# EAGLE board Maxim 7219 LED display - KingBright 7 segment SC39-11SRWA v.1.1 (EAGLE 7.0.0)
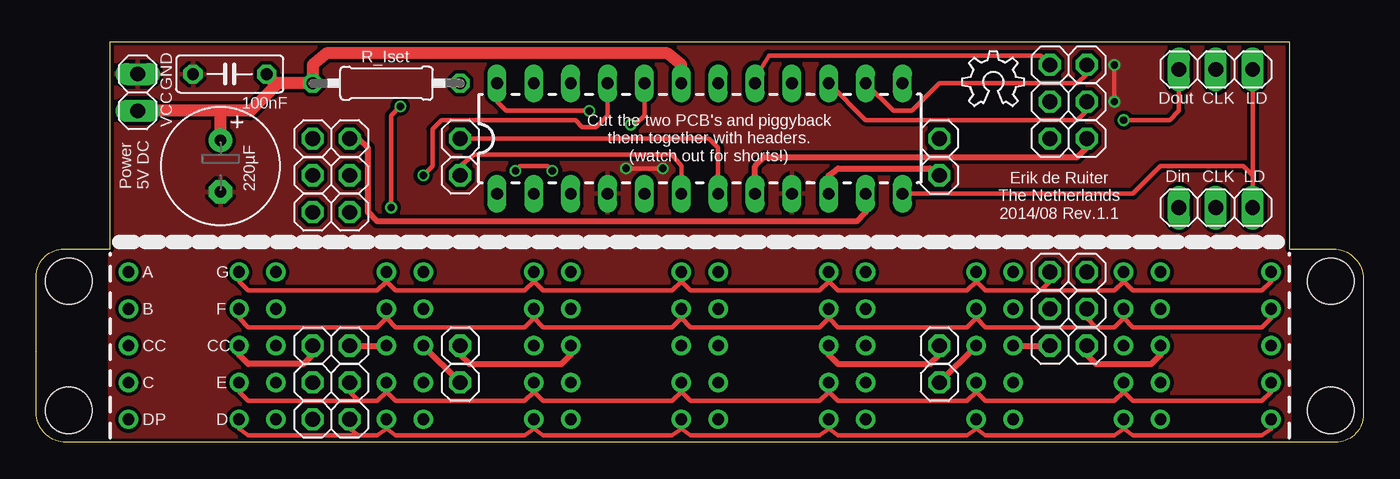
[diagram p0: board, top side]
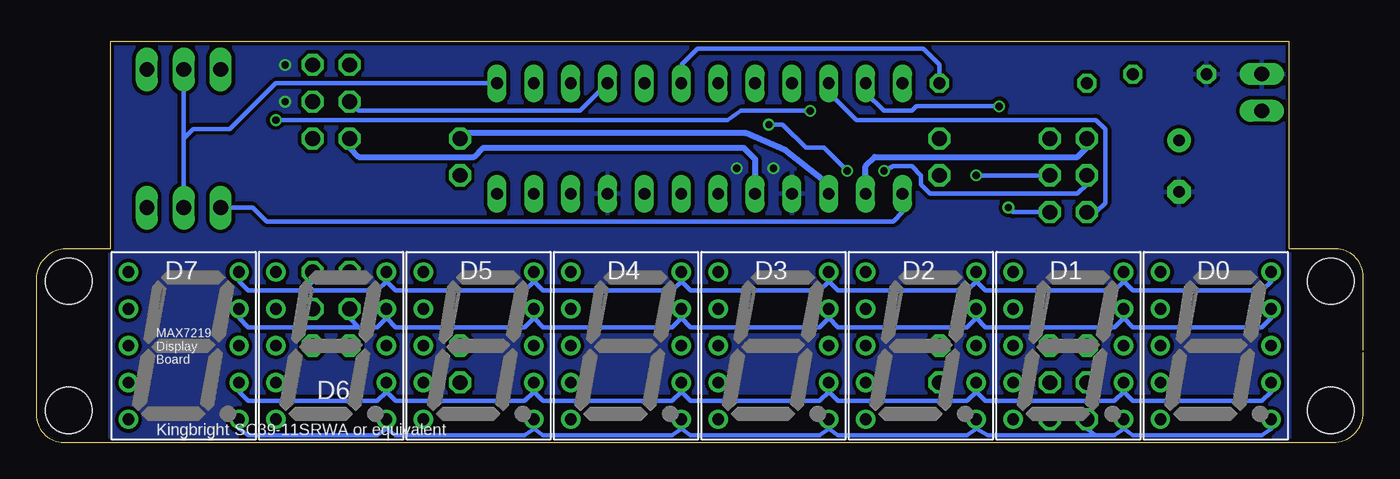
[diagram p1: board, bottom side, seen from below]

Size 91.44 x 27.62 mm. Coordinates in mm from the lower left corner, seen from the top.
Outline: 0,6.35 0,11.43 arc-90 1.91,13.34 5.08,13.34 5.08,27.62 86.36,27.62 86.36,13.34 89.38,13.34 arc-90 91.44,11.27 91.44,1.9 arc-90 89.53,0 2.06,0 arc-90 0,2.06 0,6.19
Copper layers (1*16): Top 0.035mm / dielectric 1.5mm / Bottom 0.035mm
Design rules "ITEADstudio_DRC": minimum track width 6mil, minimum drill 12mil, track to track 6mil, track to pad 6mil, pad to pad 6mil, via to via 6mil, smd to smd 0mil, copper to edge 10mil, drill to drill 10mil, minimum pad ring 10mil, minimum via ring 6mil, stop-mask expansion 2mil, vias tented up to drill 100mil, thermal gap 10mil
Holes 3.2 mm at 2.22,11.11 2.22,2.22 89.22,11.11 89.22,2.22

## Footprints (pad centres in the part's own frame; a part is rotated, then mirrored left to right if it is on the bottom)
E3,5-8 = drill 0.813 pad 1.6: + -1.778,0 | drill 0.813 pad 1.6 octagon: - 1.778,0
C050-025X075 = drill 0.813 octagon: 1 -2.54,0; 2 2.54,0
HDSP-E = drill 0.813: 1 -3.81,5.08; 2 -3.81,2.54; 3 -3.81,0; 4 -3.81,-2.54; 5 -3.81,-5.08; 6 3.81,-5.08; 7 3.81,-2.54; 8 3.81,0; 9 3.81,2.54; 10 3.81,5.08
1X01 = drill 1.016 octagon: 1 0,0
1X03 = drill 1.016 long: 1 -2.54,0; 2 0,0; 3 2.54,0
1X02 = drill 1.016 long: 1 -1.27,0; 2 1.27,0
0207/10 = drill 0.813 octagon: 1 -5.08,0; 2 5.08,0
DIL24 = drill 0.813 long: 1 -13.97,-3.81; 2 -11.43,-3.81; 3 -8.89,-3.81; 4 -6.35,-3.81; 5 -3.81,-3.81; 6 -1.27,-3.81; 7 1.27,-3.81; 8 3.81,-3.81; 9 6.35,-3.81; 10 8.89,-3.81; 11 11.43,-3.81; 12 13.97,-3.81; 13 13.97,3.81; 14 11.43,3.81; 15 8.89,3.81; 16 6.35,3.81; 17 3.81,3.81; 18 1.27,3.81; 19 -1.27,3.81; 20 -3.81,3.81; 21 -6.35,3.81; 22 -8.89,3.81; 23 -11.43,3.81; 24 -13.97,3.81

## Placement (x,y rotation side)
C3  220µF  [E3,5-8]  12.69,19.05 270 top
C4  100nF  [C050-025X075]  13.34,25.4 180 top
D0  SC39-11SRWA  [HDSP-E]  10.16,6.67 0 bottom
D1  SC39-11SRWA  [HDSP-E]  20.32,6.67 0 bottom
D2  SC39-11SRWA  [HDSP-E]  30.48,6.67 0 bottom
D3  SC39-11SRWA  [HDSP-E]  40.64,6.67 0 bottom
D4  SC39-11SRWA  [HDSP-E]  50.8,6.67 0 bottom
D5  SC39-11SRWA  [HDSP-E]  60.96,6.67 0 bottom
D6  SC39-11SRWA  [HDSP-E]  71.12,6.67 0 bottom
D7  SC39-11SRWA  [HDSP-E]  81.28,6.67 0 bottom
DIG_0_D  [1X01]  19.05,6.67 0 top
DIG_0_M  [1X01]  19.05,20.95 0 top
DIG_1_D  [1X01]  21.59,6.67 0 top
DIG_1_M  [1X01]  21.59,20.95 0 top
DIG_2_D  [1X01]  29.21,4.13 0 top
DIG_2_M  [1X01]  29.21,18.41 0 top
DIG_3_D  [1X01]  29.21,6.67 0 top
DIG_3_M  [1X01]  29.21,20.95 0 top
DIG_4_D  [1X01]  62.23,6.67 0 top
DIG_4_M  [1X01]  62.23,20.95 0 top
DIG_5_D  [1X01]  62.23,4.13 0 top
DIG_5_M  [1X01]  62.23,18.41 90 top
DIG_6_D  [1X01]  69.85,6.67 0 top
DIG_6_M  [1X01]  69.85,20.95 0 top
DIG_7_D  [1X01]  72.39,6.67 0 top
DIG_7_M  [1X01]  72.39,20.95 0 top
INPUT  [1X03]  81.28,16.19 0 top
OUTPUT  [1X03]  81.28,25.72 0 top
POWER  [1X02]  6.99,24.13 270 top
RSET  [0207/10]  24.13,24.77 0 top
SEG_A_D  [1X01]  72.39,11.75 0 top
SEG_A_M  [1X01]  72.39,26.04 0 top
SEG_B_D  [1X01]  69.85,9.21 0 top
SEG_B_M  [1X01]  69.85,23.49 0 top
SEG_C_D  [1X01]  19.05,4.13 0 top
SEG_C_M  [1X01]  19.05,18.41 0 top
SEG_D_D  [1X01]  21.59,1.59 0 top
SEG_D_M  [1X01]  21.59,15.88 0 top
SEG_DP_D  [1X01]  19.05,1.59 0 top
SEG_DP_M  [1X01]  19.05,15.88 0 top
SEG_E_D  [1X01]  21.59,4.13 0 top
SEG_E_M  [1X01]  21.59,18.41 0 top
SEG_F_D  [1X01]  72.39,9.21 0 top
SEG_F_M  [1X01]  72.39,23.49 0 top
SEG_G_D  [1X01]  69.85,11.75 0 top
SEG_G_M  [1X01]  69.85,26.04 0 top
U$2  [OSHW_6X150_NOTEXT]  63.82,23.18 0 top
U$3  MAX7219DIP  [DIL24]  45.72,20.95 0 top

## Library data of the parts
C3 C4 RSET = rcl
D0 D1-D7 = display-hp; OC_FARNELL: unknown; OC_NEWARK: unknown
DIG_0_D DIG_0_M DIG_1_D DIG_1_M DIG_2_D DIG_2_M DIG_3_D DIG_3_M DIG_4_D DIG_4_M DIG_5_D DIG_5_M DIG_6_D DIG_6_M DIG_7_D DIG_7_M INPUT OUTPUT POWER SEG_A_D SEG_A_M SEG_B_D SEG_B_M SEG_C_D SEG_C_M SEG_D_D SEG_D_M SEG_DP_D SEG_DP_M SEG_E_D SEG_E_M SEG_F_D SEG_F_M SEG_G_D SEG_G_M = pinhead
U$2 = OpenSourceHardwareLogo
U$3 = SparkFun-DigitalIC

## Nets
CLK: INPUT.2 OUTPUT.2 U$3.13
DIG0: DIG_0_M.1 U$3.2
DIG1: DIG_1_M.1 U$3.11
DIG2: DIG_2_M.1 U$3.6
DIG3: DIG_3_M.1 U$3.7
DIG4: DIG_4_M.1 U$3.3
DIG5: DIG_5_M.1 U$3.10
DIG6: DIG_6_M.1 U$3.5
DIG7: DIG_7_M.1 U$3.8
DIG_0: D0.3 DIG_0_D.1
DIG_1: D1.3 DIG_1_D.1
DIG_2: D2.8 DIG_2_D.1
DIG_3: D3.8 DIG_3_D.1
DIG_4: D4.3 DIG_4_D.1
DIG_5: D5.3 DIG_5_D.1
DIG_6: D6.8 DIG_6_D.1
DIG_7: D7.8 DIG_7_D.1
DIN: INPUT.1 U$3.1
DOUT: OUTPUT.1 U$3.24
GND: C3.- C4.2 POWER.1 U$3.4 U$3.9
LOAD: INPUT.3 OUTPUT.3 U$3.12
N$1: D6.3
N$8: D7.3
N$9: RSET.2 U$3.18
SEG_A: D0.10 D1.10 D2.10 D3.10 D4.10 D5.10 D6.10 D7.10 SEG_A_D.1
SEG_B: D0.9 D1.9 D2.9 D3.9 D4.9 D5.9 D6.9 D7.9 SEG_B_D.1
SEG_C: D0.7 D1.7 D2.7 D3.7 D4.7 D5.7 D6.7 D7.7 SEG_C_D.1
SEG_D: D0.5 D1.5 D2.5 D3.5 D4.5 D5.5 D6.5 D7.5 SEG_D_D.1
SEG_DP: D0.6 D1.6 D2.6 D3.6 D4.6 D5.6 D6.6 D7.6 SEG_DP_D.1
SEG_E: D0.4 D1.4 D2.4 D3.4 D4.4 D5.4 D6.4 D7.4 SEG_E_D.1
SEG_F: D0.2 D1.2 D2.2 D3.2 D4.2 D5.2 D6.2 D7.2 SEG_F_D.1
SEG_G: D0.1 D1.1 D2.1 D3.1 D4.1 D5.1 D6.1 D7.1 SEG_G_D.1
SEGA: SEG_A_M.1 U$3.14
SEGB: SEG_B_M.1 U$3.16
SEGC: SEG_C_M.1 U$3.20
SEGD: SEG_D_M.1 U$3.23
SEGDP: SEG_DP_M.1 U$3.22
SEGE: SEG_E_M.1 U$3.21
SEGF: SEG_F_M.1 U$3.15
SEGG: SEG_G_M.1 U$3.17
VCC: C3.+ C4.1 POWER.2 RSET.1 U$3.19

## Tracks (layer width: path | path; a pad name or v marks a point on that pad's centre or on a via)
CLK
  Bottom 0.305: U$3.13 74.93,24.77 78.11,21.59 80.64,21.59 81.28,20.95 | 81.28,20.95 OUTPUT.2 | INPUT.2 81.28,20.95
DIG0
  Bottom 0.406: U$3.2 34.29,19.05 33.66,19.68 19.68,19.68 19.05,20.32 DIG_0_M.1
DIG1
  Top 0.406: DIG_1_M.1 22.23,20.95 22.86,20.32 22.86,15.87 23.5,15.24 56.52,15.24 57.15,15.87 U$3.11
DIG2
  Top 0.305: DIG_2_M.1 29.21,19.05 30.16,19.84 43.81,19.84 44.45,19.05 U$3.6
DIG3
  Top 0.305: DIG_3_M.1 46.35,20.95 46.99,20.32 U$3.7
DIG4
  Bottom 0.406: U$3.3 36.83,17.78 39.85,20.16 42.55,21.32 61.75,21.32 DIG_4_M.1
DIG5
  Top 0.406: U$3.10 54.61,18.42 55.24,18.89 61.59,18.89 DIG_5_M.1
DIG6
  Bottom 0.406: DIG_6_M.1 69.85,20.32 69.22,19.68 61.28,19.68 60.64,20.32 42.7,20.32 41.91,19.53 U$3.5
DIG7
  Top 0.406: U$3.8 49.53,19.05 50.16,19.68 71.75,19.68 72.39,20.32 DIG_7_M.1
DIG_0
  Top 0.406: DIG_0_D.1 19.05,6.03 18.41,5.4 14.61,5.4 13.97,6.03 D0.3
DIG_1
  Top 0.406: DIG_1_D.1 D1.3
DIG_2
  Top 0.406: DIG_2_D.1 D2.8
DIG_3
  Top 0.406: DIG_3_D.1 29.21,6.03 29.84,5.4 36.2,5.4 36.83,6.03 D3.8
DIG_4
  Top 0.406: D4.3 54.61,6.03 55.24,5.4 61.59,5.4 62.23,6.03 DIG_4_D.1
DIG_5
  Top 0.406: DIG_5_D.1 D5.3
DIG_6
  Top 0.406: D6.8 DIG_6_D.1
DIG_7
  Top 0.406: DIG_7_D.1 72.39,6.03 73.03,5.4 76.83,5.4 77.47,6.03 D7.8
DIN
  Bottom 0.305: U$3.1 31.75,15.87 32.38,15.24 75.56,15.24 76.52,16.19 INPUT.1
DOUT  (via drill 0.5 pad 0.25)
  Top 0.305: U$3.24 31.75,23.49 32.38,22.86 v38.1,22.86 | v74.93,22.22 78.11,22.22 78.74,22.86 OUTPUT.1
  Bottom 0.305: v38.1,22.86 42.86,22.86 43.81,22.22 v74.93,22.22
GND  (via drill 0.5 pad 0.25)
  Top 0.305: v40.64,18.89 v43.18,18.89 | v74.3,26.04 v74.3,23.49
  pour Bottom (isolate 0.254): 5.08,27.62 86.36,27.62 86.36,0 5.08,0
  pour Top (isolate 0.254): 5.08,27.62 86.36,27.62 86.36,0 5.08,0
LOAD
  Top 0.305: U$3.12 75.56,17.15 77.47,19.05 83.19,19.05 83.82,18.42 | OUTPUT.3 83.82,18.42 | 83.82,18.42 INPUT.3
N$9
  Bottom 0.305: U$3.18 46.99,26.04 45.88,27.15 30.32,27.15 29.21,26.04 RSET.2
SEG_A
  Bottom 0.305: D0.10 6.35,11.11 6.99,10.48 15.88,10.48 16.51,11.11 | D1.10 16.51,11.11 | 16.51,11.11 17.14,10.48 26.04,10.48 26.67,11.11 | D2.10 26.67,11.11 | 26.67,11.11 27.3,10.48 36.2,10.48 36.83,11.11 | D3.10 36.83,11.11 | 36.83,11.11 37.47,10.48 46.35,10.48 46.99,11.11 | D4.10 46.99,11.11 | 46.99,11.11 47.62,10.48 56.52,10.48 57.15,11.11 | D5.10 57.15,11.11 | 57.15,11.11 57.78,10.48 66.67,10.48 67.31,11.11 | D6.10 67.31,11.11 | 67.31,11.11 67.94,10.48 73.03,10.48 | 73.03,10.48 76.83,10.48 77.47,11.11 D7.10 | SEG_A_D.1 72.39,11.11 73.03,10.48
SEG_B
  Bottom 0.305: D0.9 6.35,8.57 6.99,7.94 15.88,7.94 16.51,8.57 | D1.9 16.51,8.57 | 16.51,8.57 17.14,7.94 26.04,7.94 26.67,8.57 | D2.9 26.67,8.57 | 26.67,8.57 27.3,7.94 36.2,7.94 36.83,8.57 | D3.9 36.83,8.57 | 36.83,8.57 37.47,7.94 46.35,7.94 46.99,8.57 | D4.9 46.99,8.57 | 46.99,8.57 47.62,7.94 56.52,7.94 57.15,8.57 | D5.9 57.15,8.57 | 57.15,8.57 57.78,7.94 66.67,7.94 67.31,8.57 | D6.9 67.31,8.57 | 67.31,8.57 67.94,7.94 69.22,7.94 | 69.22,7.94 76.83,7.94 77.47,8.57 D7.9 | SEG_B_D.1 69.85,8.57 69.22,7.94
SEG_C
  Bottom 0.305: D0.7 6.35,3.49 6.99,2.86 15.88,2.86 16.51,3.49 | D1.7 16.51,3.49 | 16.51,3.49 17.14,2.86 18.41,2.86 | 18.41,2.86 26.04,2.86 26.67,3.49 | D2.7 26.67,3.49 | 26.67,3.49 27.3,2.86 36.2,2.86 36.83,3.49 | D3.7 36.83,3.49 | 36.83,3.49 37.47,2.86 46.35,2.86 46.99,3.49 | D4.7 46.99,3.49 | 46.99,3.49 47.62,2.86 56.52,2.86 57.15,3.49 | D5.7 57.15,3.49 | 57.15,3.49 57.78,2.86 66.67,2.86 67.31,3.49 | D6.7 67.31,3.49 | 67.31,3.49 67.94,2.86 76.83,2.86 77.47,3.49 D7.7 | SEG_C_D.1 19.05,3.49 18.41,2.86
SEG_D
  Top 0.305: D0.5 13.97,0.95 14.61,0.47 22.23,0.47 | 22.23,0.47 23.5,0.47 24.13,0.95 | D1.5 24.13,0.95 | 24.13,0.95 24.77,0.47 33.66,0.47 34.29,0.95 | D2.5 34.29,0.95 | 34.29,0.95 34.92,0.47 43.81,0.47 44.45,0.95 | D3.5 44.45,0.95 | 44.45,0.95 45.09,0.47 53.98,0.47 54.61,0.95 | D4.5 54.61,0.95 | 54.61,0.95 55.24,0.47 64.14,0.47 64.77,0.95 | D5.5 64.77,0.95 | 64.77,0.95 65.41,0.47 74.3,0.47 74.93,0.95 | D6.5 74.93,0.95 | 74.93,0.95 75.56,0.47 84.45,0.47 85.09,0.95 D7.5 | SEG_D_D.1 21.59,0.95 22.23,0.47
SEG_DP
  Bottom 0.305: D0.6 6.35,0.95 6.99,0.47 15.88,0.47 16.51,0.95 | D1.6 16.51,0.95 | 16.51,0.95 17.14,0.47 18.41,0.47 | 18.41,0.47 25.88,0.47 26.67,0.95 | D2.6 26.67,0.95 | 26.67,0.95 27.3,0.47 36.2,0.47 36.83,0.95 | D3.6 36.83,0.95 | 36.83,0.95 37.47,0.47 46.35,0.47 46.99,0.95 | D4.6 46.99,0.95 | 46.99,0.95 47.62,0.47 56.52,0.47 57.15,0.95 | D5.6 57.15,0.95 | 57.15,0.95 57.78,0.47 66.67,0.47 67.31,0.95 | D6.6 67.31,0.95 | 67.31,0.95 67.94,0.47 76.83,0.47 77.47,0.95 D7.6 | SEG_DP_D.1 19.05,0.95 18.41,0.47
SEG_E
  Top 0.305: D0.4 13.97,3.49 14.61,2.86 22.23,2.86 | 22.23,2.86 23.5,2.86 24.13,3.49 | D1.4 24.13,3.49 | 24.13,3.49 24.77,2.86 33.66,2.86 34.29,3.49 | D2.4 34.29,3.49 | 34.29,3.49 34.92,2.86 43.81,2.86 44.45,3.49 | D3.4 44.45,3.49 | 44.45,3.49 45.09,2.86 53.98,2.86 54.61,3.49 | D4.4 54.61,3.49 | 54.61,3.49 55.24,2.86 64.14,2.86 64.77,3.49 | D5.4 64.77,3.49 | 64.77,3.49 65.41,2.86 74.3,2.86 74.93,3.49 | D6.4 74.93,3.49 | 74.93,3.49 75.56,2.86 84.45,2.86 85.09,3.49 D7.4 | SEG_E_D.1 21.59,3.49 22.23,2.86
SEG_F
  Top 0.305: D0.2 13.97,8.57 14.61,7.94 23.5,7.94 24.13,8.57 | D1.2 24.13,8.57 | 24.13,8.57 24.77,7.94 33.66,7.94 34.29,8.57 | D2.2 34.29,8.57 | 34.29,8.57 34.92,7.94 43.81,7.94 44.45,8.57 | D3.2 44.45,8.57 | 44.45,8.57 45.09,7.94 53.98,7.94 54.61,8.57 | D4.2 54.61,8.57 | 54.61,8.57 55.24,7.94 64.14,7.94 64.77,8.57 | D5.2 64.77,8.57 | 64.77,8.57 65.41,7.94 73.03,7.94 | 73.03,7.94 74.3,7.94 74.93,8.57 | D6.2 74.93,8.57 | 74.93,8.57 75.56,7.94 84.45,7.94 85.09,8.57 D7.2 | SEG_F_D.1 72.39,8.57 73.03,7.94
SEG_G
  Top 0.305: D0.1 13.97,11.11 14.61,10.48 23.5,10.48 24.13,11.11 | D1.1 24.13,11.11 | 24.13,11.11 24.77,10.48 33.66,10.48 34.29,11.11 | D2.1 34.29,11.11 | 34.29,11.11 34.92,10.48 43.81,10.48 44.45,11.11 | D3.1 44.45,11.11 | 44.45,11.11 45.09,10.48 53.98,10.48 54.61,11.11 | D4.1 54.61,11.11 | 54.61,11.11 55.24,10.48 64.14,10.48 64.77,11.11 | D5.1 64.77,11.11 | 64.77,11.11 65.41,10.48 69.22,10.48 | 69.22,10.48 74.3,10.48 74.93,11.11 | D6.1 74.93,11.11 | 74.93,11.11 75.56,10.48 84.45,10.48 85.09,11.11 D7.1 | SEG_G_D.1 69.85,11.11 69.22,10.48
SEGA
  Top 0.305: U$3.14 59.05,22.86 60.33,22.86 62.23,24.77 71.75,24.77 72.39,25.4 SEG_A_M.1
SEGB
  Bottom 0.305: U$3.16 53.98,22.86 69.22,22.86 SEG_B_M.1
SEGC  (via drill 0.5 pad 0.25)
  Top 0.305: v33.02,18.73 33.34,19.05 35.24,19.05 v35.56,18.73 | U$3.20 41.91,22.54 41.27,21.91 v40.96,21.91
  Bottom 0.305: v33.02,18.73 32.38,19.05 31.11,19.05 30.48,18.42 30.48,17.78 29.84,17.15 19.68,17.15 19.05,17.78 SEG_C_M.1 | v40.96,21.91 40.01,21.91 38.42,20.32 37.15,20.32 v35.56,18.73
SEGD  (via drill 0.5 pad 0.25)
  Top 0.305: v24.45,16.19 24.45,22.54 v25.08,23.18
  Bottom 0.305: U$3.23 34.29,24.13 33.02,22.86 31.11,22.86 30.8,23.18 v25.08,23.18 | SEG_D_M.1 24.13,15.87 v24.45,16.19
SEGDP
  Bottom 0.305: U$3.22 36.83,24.13 34.92,22.22 18.41,22.22 17.78,21.59 17.78,16.51 18.41,15.87 SEG_DP_M.1
SEGE  (via drill 0.5 pad 0.25)
  Top 0.305: U$3.21 39.37,22.54 38.58,21.75 37.62,21.75 37.15,22.22 27.94,22.22 27.3,21.59 27.3,19.05 v26.67,18.42
  Bottom 0.305: v26.67,18.42 SEG_E_M.1
SEGF
  Top 0.305: U$3.15 57.15,22.22 71.75,22.22 72.39,22.86 SEG_F_M.1
SEGG
  Top 0.305: U$3.17 49.53,25.08 50.48,26.67 69.22,26.67 SEG_G_M.1
VCC
  Top 0.813: U$3.19 44.45,26.04 43.5,26.83 20,26.83 19.05,26.04 RSET.1 16.35,24.77 16.35,24.92 | 16.35,24.92 16.51,24.77 16.51,24.61 14.76,22.86 12.7,22.86 | 16.35,24.92 C4.1 | 12.7,22.86 POWER.2 | C3.+ 12.7,22.85 12.7,22.86

## Text on the board
tPlace: R_Iset | GND | 100nF | Dout | CLK | LD | VCC | Cut the two PCB's and piggyback / them together with headers. / (watch out for shorts!) | Din | CLK | LD | Power / 5V DC | 220µF | Erik de Ruiter / The Netherlands / 2014/08 Rev.1.1 | A | G | B | F | CC | CC | C | E | DP | D
bPlace: MAX7219 / Display / Board | Kingbright SC39-11SRWA or equivalent